# Altium PCB loratea.PcbDoc
Units mm, origin at the board's own origin, x right, y up, seen from the top; angles counter-clockwise.
Board outline 95.27 x 95.25 mm, 2 copper layers (Top Layer, Bottom Layer); 46 components, 36 nets, 161 pads, 104 vias.
Unrouted connection lines stored in the file: 1.
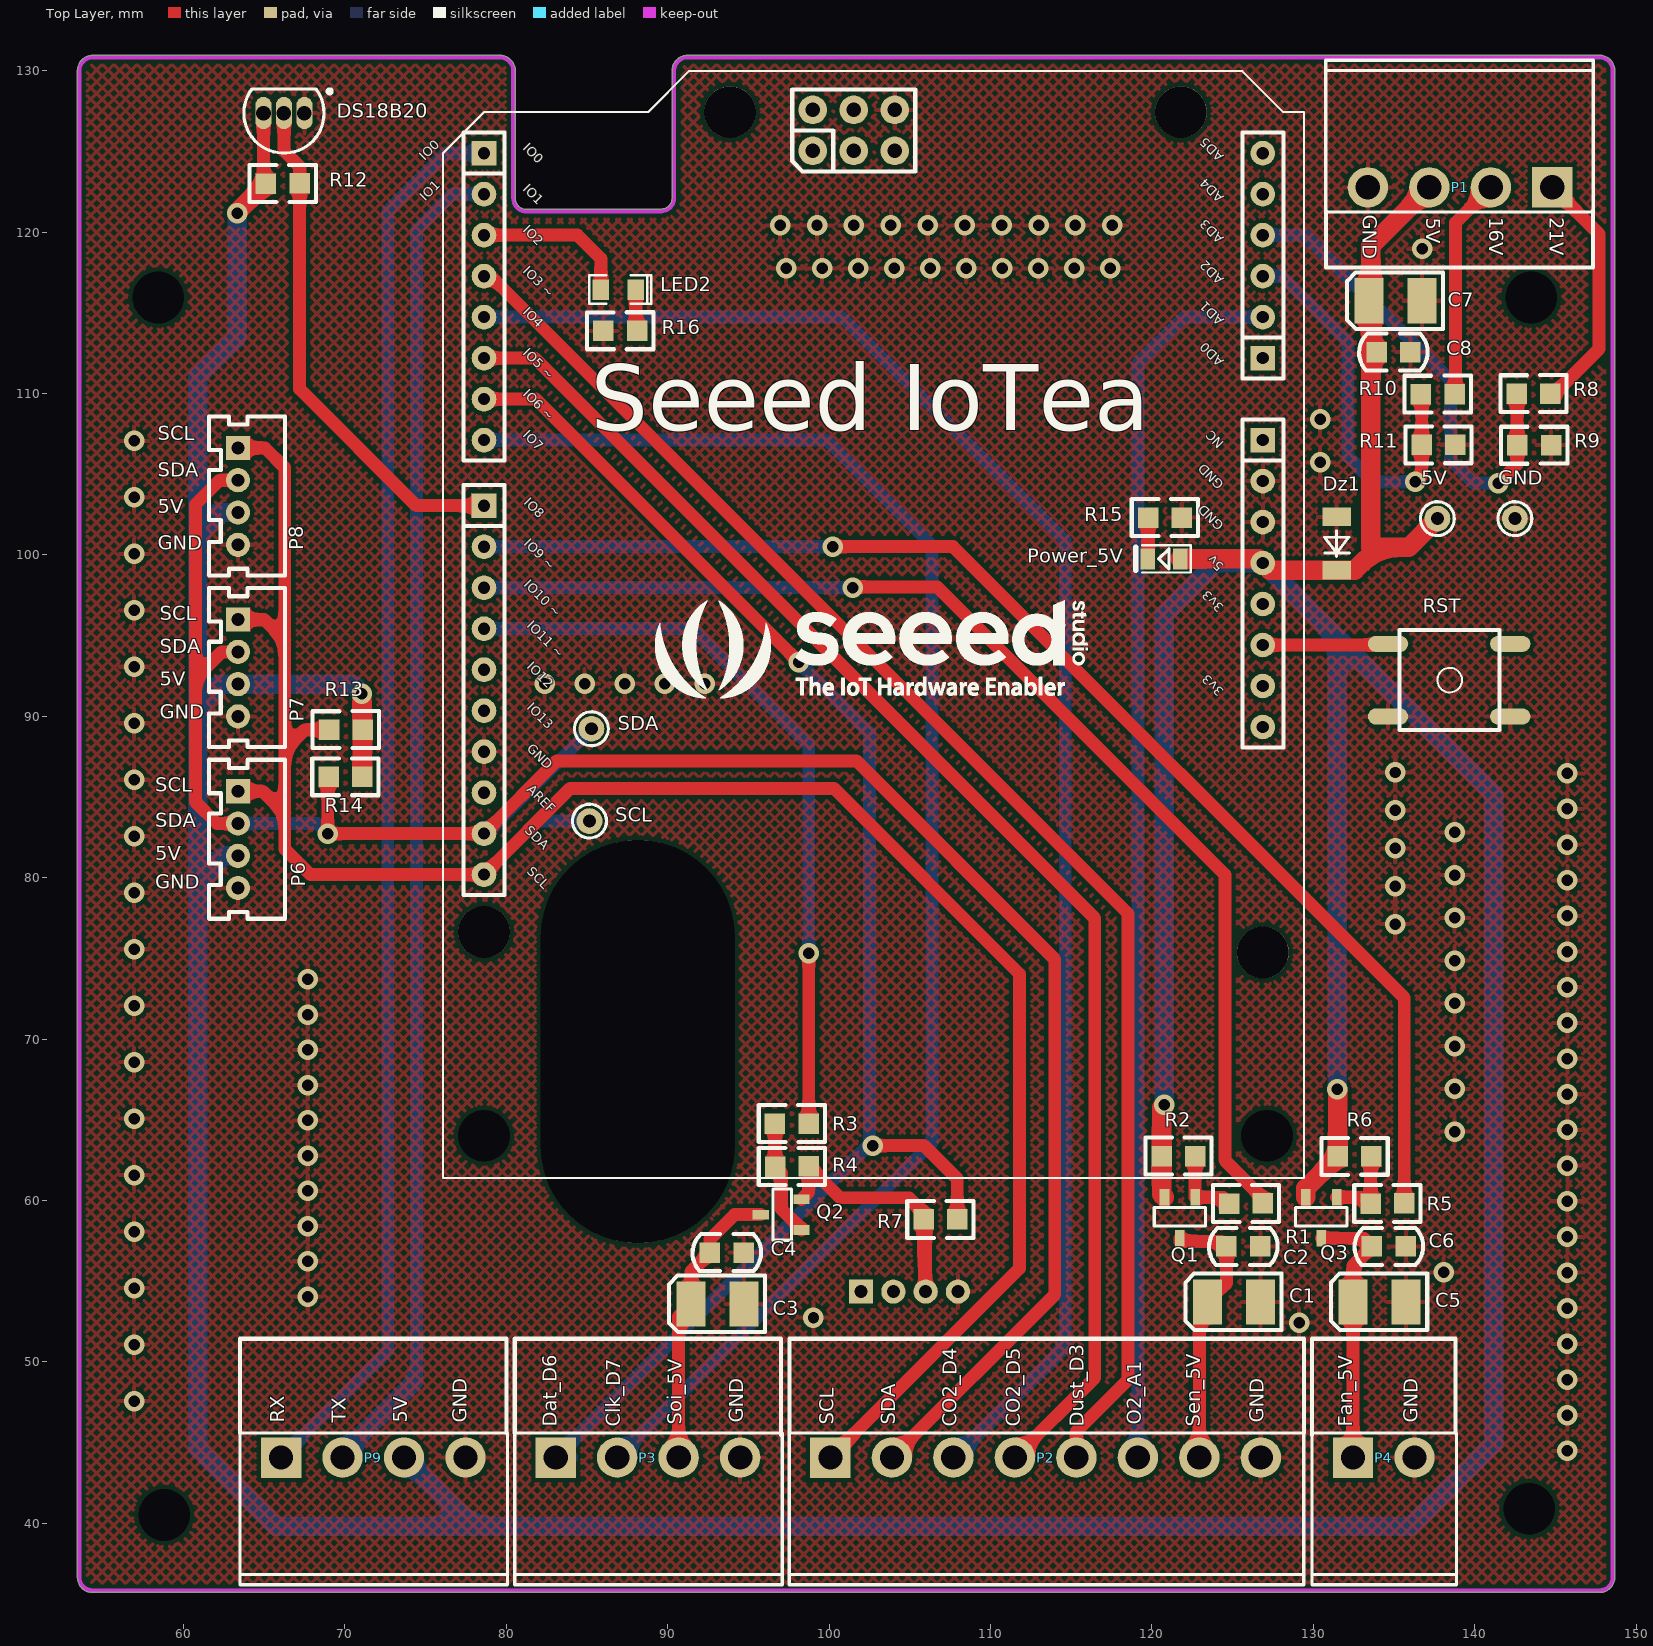
[diagram p0: Top Layer view]
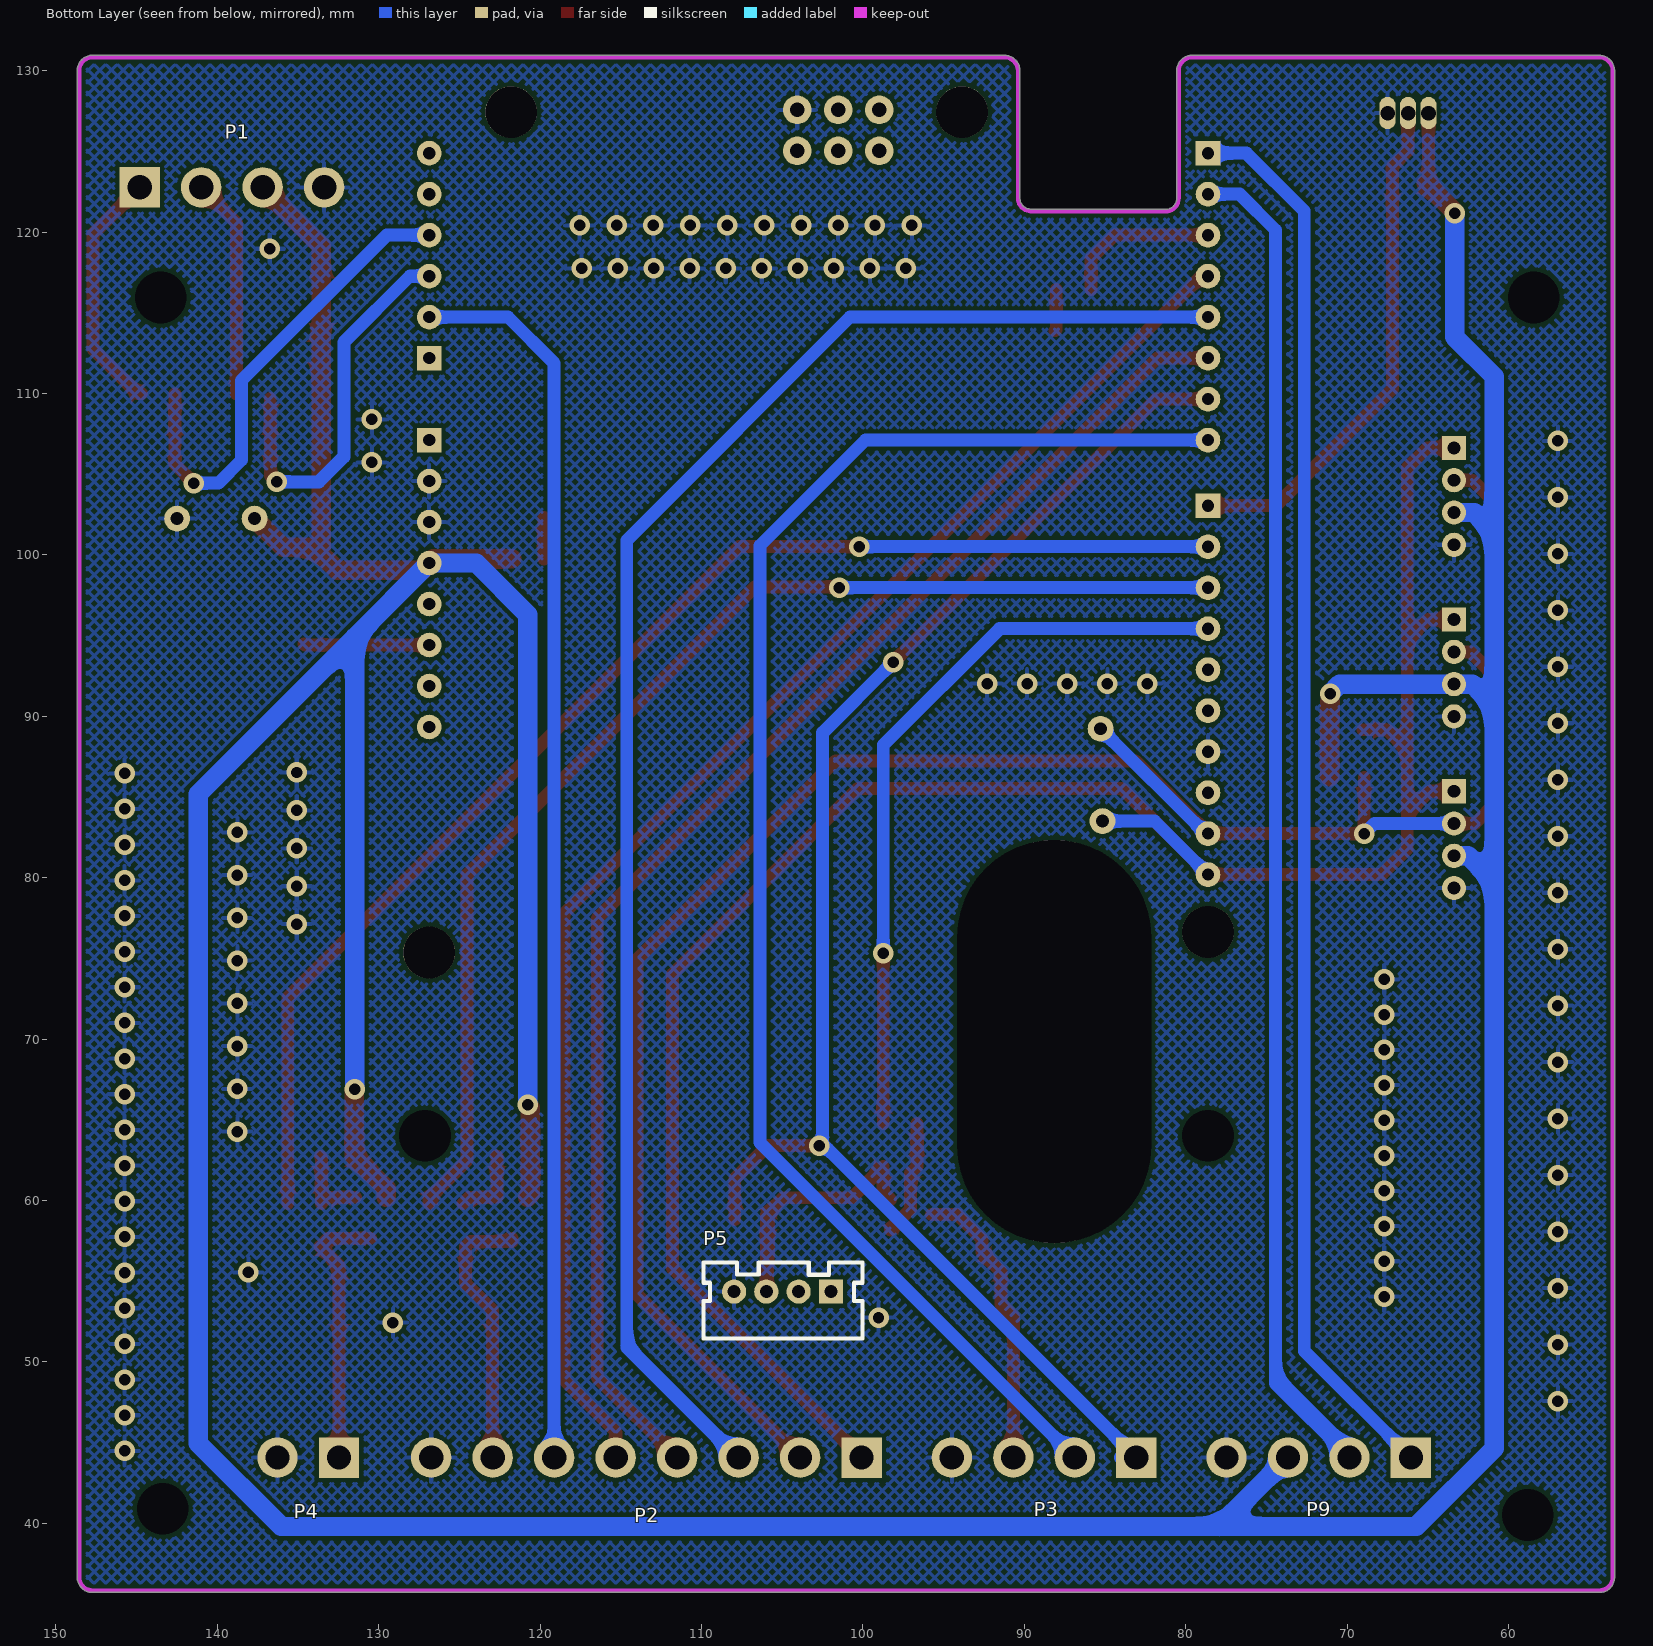
[diagram p1: Bottom Layer view, seen from below]

## Layer stack, top to bottom
Top Solder: solder mask 0.0102, Solder Resist, Dk 3.5
Top Layer: signal copper 0.0356
Dielectric 1: dielectric 0.32, FR-4, Dk 4.8
Bottom Layer: signal copper 0.0356
Bottom Solder: solder mask 0.0102, Solder Resist, Dk 3.5

## Board outline
53.422,36.609 ccw(c54.361,36.65) 54.361,35.71 147.737,35.71 ccw(c147.737,36.65) 148.677,36.65 ccw(c148.55,36.65) 148.675,36.672 ccw(c148.551,36.699) 148.678,36.699 148.678,130.022 ccw(c147.738,130.022) 147.738,130.962 ccw(c147.738,130.835) 147.686,130.951 91.21,130.951 ccw(c91.21,130.011) 90.27,130.011 90.27,122.114 cw(c89.584,122.114) 89.584,121.428 ccw(c89.584,121.301) 89.523,121.412 81.259,121.412 ccw(c81.236,121.287) 81.236,121.414 cw(c81.236,122.1) 80.55,122.1 80.55,130.011 ccw(c79.61,130.011) 79.775,130.937 ccw(c79.716,130.824) 79.716,130.951 54.36,130.951 ccw(c54.36,130.011) 53.421,130.051 ccw(c53.538,130.002) 53.411,130.002 53.411,36.66 ccw(c53.538,36.66)

## Design rules (kind name [scope] priority, off if disabled: settings)
Clearance [All] p1: gap=0.254
PolygonConnect [All] p1: connectstyle=Relief reliefconductorwidth=0.254 reliefentries=4 polygonreliefangle="90 Angle" airgapwidth=0.254
RoutingVias [All] p1: holewidth=0.711 width=1.27 viastyle="Through Hole" minholewidth=0.711 minwidth=1.27 maxholewidth=0.711 maxwidth=1.27
SolderMaskExpansion [All] p1: expansion=0.102
Width [All] p1: maxlimit=20 minlimit=0.254 preferedwidth=0.8 minimp=50.000000 maximp=50.000000 favimp=50.000000
30 further rules are at their usual default settings.

## Components (designator, comment, footprint, x,y, rotation, side; value= is the part's Value field where it differs from the comment)
5V "TestPoint" TP 137.69,102.25 r0 top (schematic designator TP4)
C1 "220uF" C3528 125.095,53.721 r0 top
C2 "0.1uF" C0805 126.873,57.15 r180 top
C3 "220uF" C3528 93.091,53.594 r0 top
C4 "0.1uF" C0805 94.869,56.769 r180 top
C5 "220uF" C3528 134.112,53.721 r0 top
C6 "0.1uF" C0805 135.89,57.15 r180 top
C7 "220uF" C3528 135.1,115.75 r0 top
C8 "0.1uF" C0805 136.17,112.57 r180 top
DS18B20 "DS18B20" TO92C 66.22,127.38 r90 top (schematic designator U1)
Dz1 "Diode-Zener" DIODE-0.2-SMD 131.445,102.362 r270 top
GND "TestPoint" TP 142.49,102.25 r0 top (schematic designator TP3)
LED2 "LED" LED0805G 85.86,116.44 r0 top
P1 "Header 4" 2EDG3.81-4P 144.81,122.78 r180 top
P2 "Header 8" 2EDG3.81-8P 103.886,44.069 r0 top
P3 "Header 4" 2EDG3.81-4P 83.058,44.069 r0 top
P4 "Header 2" 2EDG3.81-2P 132.461,44.069 r0 top
P5 "Soil_Grove_Power" PH2.0-4 101.981,54.356 r0 bottom
P6 "Header 4" PH2.0-4 63.37,85.36 r270 top
P7 "Header 4" PH2.0-4 63.37,95.995 r270 top
P8 "Header 4" PH2.0-4 63.37,106.63 r270 top
P9 "Header 4" 2EDG3.81-4P 66.04,44.069 r0 top
Power_5V "LED-R" LED0805 121.75,99.76 r180 top (schematic designator LED1)
Q1 "pMOS" AO3415 122.682,60.198 r180 top
Q2 "pMOS" AO3415 98.298,58.166 r90 top
Q3 "pMOS" AO3415 131.445,60.198 r180 top
R1 "100R" R0805 126.873,59.817 r180 top
R2 "100R" R0805 122.69,62.75 r180 top
R3 "100R" R0805 98.735,64.77 r180 top
R4 "100R" R0805 96.647,62.103 r0 top
R5 "100R" R0805 135.636,59.817 r180 top
R6 "100R" R0805 133.604,62.738 r180 top
R7 "100R" R0805 107.94,58.83 r180 top
R8 "53.6K" R0805 142.6,109.99 r0 top
R9 "10K" R0805 144.73,106.801 r180 top
R10 "38.3K" R0805 136.67,109.96 r0 top
R11 "10K" R0805 138.8,106.826 r180 top
R12 "4.7K" R0805 67.19,123.02 r180 top
R13 "4.7K" R0805 69.01,89.17 r0 top
R14 "4.7K" R0805 68.98,86.25 r0 top
R15 "1k" R0805 121.85,102.32 r180 top
R16 "1K" R0805 86.01,113.888 r0 top
RST "SW-3s" KEY6X6SMD 138.47,92.24 r180 top (schematic designator SW1)
SCL "TestPoint" TP 85.15,83.51 r0 top (schematic designator TP1)
SDA "TestPoint" TP 85.27,89.23 r0 top (schematic designator TP2)
"Seeed IoTea" "Seeeduino LoRaWAN" "Seeeduino LoRaWAN" 102.743,101.473 r90 top (schematic designator "Seeeduino LoRaWAN")

## Footprints (in the part's own frame and the unit in brackets; to place one, negate y for a bottom-side part, rotate by r counter-clockwise, add the part's x,y. Pads: shape width x height; smd on the part's side, far side on the other; paste and mask are expansions set on the pad)
2EDG3.81-2P [mm]
  rect 2.5x2.5 hole 1.5: 1(0,0)
  round 2.5 hole 1.5: 2(3.81,0)
  silkscreen extent -2.54,-7.87 6.41,1.52, body extent -2.63,-7.77 6.38,1.53, height 7.25
2EDG3.81-4P [mm]
  rect 2.5x2.5 hole 1.5: 1(0,0)
  round 2.5 hole 1.5: 2(3.81,0) 3(7.62,0) 4(11.43,0)
  silkscreen extent -2.54,-7.87 14.03,1.52, body extent -2.6,-8 14.03,1.3, height 7.25
2EDG3.81-8P [mm]
  rect 2.5x2.5 hole 1.5: 1(-3.81,0)
  round 2.5 hole 1.5: 2(0,0) 3(3.81,0) 4(7.62,0) 5(11.43,0) 6(15.24,0) 7(19.05,0) 8(22.86,0)
  silkscreen extent -6.35,-7.87 25.53,1.52, body extent -6.41,-8 25.59,1.3, height 7.25
AO3415 [mm] "AO3415 pMOSFET (Vds=20V, Id=-4A)"
  rect 0.6x1 smd: D(0.955,2.54) G(0,0) S(1.905,0)
  silkscreen extent -0.64,0.63 2.54,1.78
C0805 [mil]
  rect 50x50 smd: 1(6,0) 2(88.7,-0.1)
  silkscreen extent -36,-45 131,45, body extent 8,-24 87,25, height 30
C3528 [mil] "B型"
  rect 70.87x110 smd: 1(-64.5,0) 2(64.5,0)
  silkscreen extent -119,-69 116,69, body extent -69,-55 69,55, height 75
DIODE-0.2-SMD [mil] "1N4148柱状贴片封装"
  rect 45x70 smd: 1(0,0) 2(130,0)
  silkscreen extent 34,-30 97,31
KEY6X6SMD [mm]
  oval 2.5x1 smd: 1(-3.734,2.25) 1(3.835,2.25) 2(-3.734,-2.25) 2(3.835,-2.25)
  silkscreen extent -3.08,-3.1 3.12,3.09, body extent -4.48,-3.1 4.52,3.1, height 4.5
LED0805 [mm]
  rect 0.9x1.3 smd: 1(0,0) 2(2,0)
  silkscreen extent -0.65,-0.85 2.74,0.85
LED0805G [mil]
  rect 40x50 smd: 1(0,0) 2(85,0)
  silkscreen extent -29,-35 123,35, body extent 3,-24 83,25, height 43
PH2.0-4 [mm]
  rect 1.5x1.5 hole 0.8: 1(0,0)
  round 1.5 hole 0.8: 2(2,0) 3(4,0) 4(6,0)
  silkscreen extent -1.95,-1.79 7.9,2.91
R0805 [mm] "1/8W"
  rect 1.27x1.27 smd: 1(0,0) 2(2.09,0.005)
  silkscreen extent -1.01,-1.14 3.1,1.15, body extent 0.04,-0.62 2.04,0.64, height 0.55
"Seeeduino LoRaWAN" [mil]
  round 125.98 hole 125.98: 0(-1027.76,-950) 0(-977.76,950) 0(1022.24,-750) 0(1022.24,350)
  rect 60x60 hole 30: 0(922.24,950) 8(62.24,950) A0(422.24,-950) NC(222.24,-950)
  round 60 hole 30: 1(822.24,950) 2(722.24,950) 3(622.24,950) 3V3(-377.76,-950) 3V3(-177.76,-950) 4(522.24,950) 5(422.24,950) 5V(-77.76,-950) 6(322.24,950) 7(222.24,950) 9(-37.76,950) 10(-137.76,950) 11(-237.76,950) 12(-337.76,950) 13(-437.76,950) A1(522.24,-950) A2(622.24,-950) A3(722.24,-950) A4(822.24,-950) A5(922.24,-950) AREF(-637.76,950) GND(-537.76,950) GND(22.24,-950) GND(122.24,-950) RESERVE(-477.76,-950) RST(-277.76,-950) SCL(-837.76,950) SDA(-737.76,950)
  round 70 hole 35.43: GND(1027.76,-51.97) MISO(927.76,148.03) MOSI(1027.76,48.03) RST(927.76,-51.97) SCK(927.76,48.03) VCC(1027.76,148.03)
  silkscreen extent -1578,-1050 1122,1050, body extent -888,-1000 1078,1000, height 485
TO92C [mm] "TO, Flat Index; 3 In-Line, Axial Leads; Body Dia. 4.5mm; Leads 0.51 x 0.48 mm (max)"
  oval 2x1 hole 0.9: 1(0,-1.27) 2(0,0) 3(0,1.27)
  silkscreen extent -2.48,-2.96 1.5,2.48, body extent -2.32,-2.45 1.68,2.35, height 8.09
TP [mm] "测试点"
  round 1.6 hole 0.8: 1(0,0)
  silkscreen extent -1.05,-1.05 1.05,1.05

## Part data
5V GND SCL SDA: "一个测试点"
C1 C2 C3 C4 C5 C6 C7 C8: library part Cap, "无极电容"
DS18B20: "单总线温度传感器"
Dz1: "稳压二极管"
LED2: "绿色发光二极管"
P1 P3 P6 P7 P8 P9: "Header, 4-Pin"
P2: "Header, 8-Pin"
P4: "Header, 2-Pin"
P5: library part "Header 4", "Header, 4-Pin"
Power_5V: "红色发光二极管"
Q1 Q2 Q3: library part pMOS-FET, "增强型P沟道金属氧化物半导体场效应晶体管"
R1 R2 R3 R4 R5 R6 R7 R8 R9 R10 R11 R12 R13 R14 R15 R16: library part RES, "电阻  RES"
RST: "开关排，3位"

## Free pads (board coordinates)
  round 1.524 hole 3.2: 0(58.42,115.951) 0(58.801,40.513) 0(78.613,64.008) 0(127.127,64.008) 0(143.383,40.894) 0(143.51,115.951)
  rrect100% 10x25 hole 12 slot 25 at 90 deg: 0(88.138,69.85)

## Via types
v1: diameter 1.27, hole 0.711, Top Layer to Bottom Layer, 104 vias

## Nets (pads, with @x,y where several pads share a name; then routed paths per layer and width w, separated by ;. In a path a pad name is that pad's centre, name@x,y a point inside that pad or via, vN(x,y) a via of type N, cw(c..) or ccw(c..) an arc to the next point about the centre after c; other vN are vias at no path point)
5V: 5V.1 "Seeed IoTea.5V" C7.1 C8.2 DS18B20.3 Dz1.2 P1.3 P6.3 P7.3 P8.3 P9.3 Power_5V.1 Q1.S Q3.S R2.2 R6.2 R12.2 R13.2 R14.2 | length 378.7
  Top Layer w0.8: DS18B20.3 64.95,123.165 R12.2
  Top Layer w1.2: v1@63.287,121.203 R12.2 ; v1(71.05,91.4) 71.05,89.225 R13.2 71.07,89.145 R14.2 ; v1(120.77,65.93) 120.6,65.76 R2.2 120.6,60.375 Q1.S ; Power_5V.1 126.611,99.76 126.873,99.498 127.311,99.06 Dz1.2 132.57,99.06 133.99,100.48 ; Q3.S 129.54,60.759 R6.2 v1@131.514,66.856 ; P1.3 133.57,119.16 133.57,100.48 135.92,100.48 5V.1
  Bottom Layer w1.2: v1(63.33,121.16) 63.33,113.51 60.88,111.06 60.88,101.39 ; P6.3 62.5,81.36 60.88,79.74 ; P8.3 62.12,102.63 60.88,101.39 ; v1(71.05,91.4) 70.455,91.995 P7.3 62.225,91.995 60.88,90.65 ; P9.3 77.929,39.8 ; v1(120.77,65.93) 120.77,96.31 123.958,99.498 126.873,99.498 131.48,94.891 ; v1(131.48,66.89) 131.48,94.891 ; 60.88,79.74 60.88,44.64 65.72,39.8 77.929,39.8 ; 60.88,79.74 60.88,90.65 ; 60.88,90.65 60.88,101.39 ; 77.929,39.8 136.029,39.8 141.18,44.951 141.18,85.191 131.48,94.891
16V: P1.2 R10.2 | length 13.7
  Top Layer w0.8: R10.2@138.81,109.965 138.81,120.59 P1.2
21V: P1.1 R8.2 | length 15.4
  Top Layer w0.8: R8.2 144.929,109.995 147.71,112.776 147.71,119.88 P1.1
A0: "Seeed IoTea.A0"
A2: "Seeed IoTea.A2" R10.1 R11.2 | length 24.2
  Top Layer w0.8: v1(136.33,104.53) 136.71,104.91 R11.2 ; R11.2@136.72,106.821 R10.1@136.72,109.7
  Bottom Layer w0.8: 126.873,117.278 128.062,117.278 132.16,113.18 132.16,106.08 133.71,104.53 v1(136.33,104.53)
A3: "Seeed IoTea.A3" R8.1 R9.2 | length 29.9
  Top Layer w0.8: v1(141.46,104.45) 142.64,105.63 R9.2 ; R9.2@142.63,106.796 R8.1@142.63,109.99
  Bottom Layer w0.8: 126.873,119.818 129.502,119.818 138.5,110.82 138.5,105.88 139.93,104.45 v1(141.46,104.45)
A4: "Seeed IoTea.A4"
A5: "Seeed IoTea.A5"
BME280_SCL: "Seeed IoTea.SCL" P2.1 P6.1 P7.1 P8.1 R13.1 SCL.1 | length 134.6
  Top Layer w0.8: P6.1 64.9,85.36 66.27,83.99 ; P7.1 64.975,95.995 66.27,94.7 66.27,93.2 ; P8.1 65.05,106.63 66.27,105.41 66.27,93.2 ; R13.1 67.51,89.17 66.27,87.93 ; P2.1 111.8,55.793 111.8,74.04 100.3,85.54 83.959,85.54 78.613,80.194 67.856,80.194 66.27,81.78 66.27,83.99 ; 66.27,83.99 66.27,87.93 ; 66.27,87.93 66.27,93.2
  Bottom Layer w0.8: 78.613,80.194 81.929,83.51 SCL.1
BME280_SDA: "Seeed IoTea.SDA" P2.2 P6.2 P7.2 P8.2 R14.1 SDA.1 | length 133.9
  Top Layer w0.8: 60.73,92.36 62.365,93.995 P7.2 ; P6.2 62.07,83.36 60.73,84.7 60.73,103.13 62.23,104.63 P8.2 ; R14.1@68.934,86.204 v1(68.934,82.734) 78.613,82.734 83.119,87.24 101.69,87.24 113.98,74.95 113.98,54.163 P2.2
  Bottom Layer w0.8: P6.2 68.308,83.36 v1(68.934,82.734) ; 78.613,82.734 78.774,82.734 SDA.1
CO2_D4: "Seeed IoTea.4" P2.3 | length 111.3
  Bottom Layer w0.8: 78.613,114.738 100.792,114.738 114.63,100.9 114.63,51.003 ; 114.63,51.003 114.63,50.89 107.809,44.069 P2.3 114.63,51.003
CO2_D5: "Seeed IoTea.5" P2.4 | length 87.7
  Top Layer w0.8: 78.613,112.198 81.752,112.198 116.46,77.49 116.46,49.023 P2.4
D2: "Seeed IoTea.2" LED2.1 | length 9.8
  Top Layer w0.8: 78.613,119.818 84.402,119.818 85.86,118.36 LED2.1
D8: "Seeed IoTea.8" DS18B20.2 R12.1 | length 31.9
  Top Layer w0.8: DS18B20.2 66.22,125.03 67.19,124.06 R12.1 67.19,110.28 74.416,103.054 78.613,103.054
D9: "Seeed IoTea.9" R5.1 | length 81.3
  Top Layer w0.8: v1(100.226,100.514) 107.676,100.514 135.636,72.554 R5.1
  Bottom Layer w0.8: 78.613,100.514 99.814,100.514 v1(100.226,100.514)
D10: "Seeed IoTea.10" R1.1 | length 74.7
  Top Layer w0.8: v1(101.464,97.974) 101.58,98.02 106.7,98.02 124.52,80.2 124.52,62.5 126.873,60.147 R1.1
  Bottom Layer w0.8: 78.613,97.974 v1(101.464,97.974)
D11: "Seeed IoTea.11" R3.1 | length 46.6
  Top Layer w0.8: R3.1 v1(98.735,75.312)
  Bottom Layer w0.8: 78.613,95.434 91.526,95.434 98.735,88.225 v1(98.735,75.312)
D12: "Seeed IoTea.12"
D13: "Seeed IoTea.13"
DUST_D3: "Seeed IoTea.3" P2.5 | length 91.3
  Top Layer w0.8: 78.613,117.278 79.022,117.278 118.52,77.78 118.52,48.894 115.316,45.69 P2.5
GND: "Seeed IoTea.GND" C1.2 C2.1 C3.2 C4.1 C5.2 C6.1 C7.2 C8.1 DS18B20.1 Dz1.1 GND.1 P1.4 P2.8 P3.4 P4.2 P5.4 P6.4 P7.4 P8.4 P9.4 R9.1 R11.1 R15.1 R16.1 RST.1
  other v1: 145.75,44.48 145.75,46.69 56.93,47.57 145.75,48.9 56.93,51.07 145.75,51.11 129.12,52.43 99.03,52.74 145.75,53.32 67.69,54.05 56.93,54.57 145.75,55.53 138.08,55.55 67.69,56.233 145.75,57.74 56.93,58.07 67.69,58.417 145.75,59.95 67.69,60.6 56.93,61.57 145.75,62.16 67.69,62.783 138.76,64.27 145.75,64.37 67.69,64.967 56.93,65.07 145.75,66.58 138.76,66.919 67.69,67.15 56.93,68.57 145.75,68.79 67.69,69.333 138.76,69.567 145.75,71 67.69,71.517 56.93,72.07 138.76,72.216 145.75,73.21 67.69,73.7 138.76,74.865 145.75,75.42 56.93,75.57 135.08,77.12 138.76,77.514 145.75,77.63 56.93,79.07 135.08,79.47 145.75,79.84 138.76,80.162 135.08,81.82 145.75,82.05 56.93,82.57 138.76,82.811 135.08,84.17 145.75,84.26 56.93,86.07 145.75,86.47 135.08,86.52 56.93,89.57 82.37,92.03 84.852,92.03 87.335,92.03 89.817,92.03 92.3,92.03 56.93,93.07 56.93,96.57 56.93,100.07 56.93,103.57 130.42,105.73 56.93,107.07 130.42,108.402 97.33,117.76 99.563,117.76 101.797,117.76 104.03,117.76 106.263,117.76 108.497,117.76 110.73,117.76 112.963,117.76 115.197,117.76 117.43,117.76 136.75,118.97 96.96,120.42 99.248,120.42 101.536,120.42 103.823,120.42 106.111,120.42 108.399,120.42 110.687,120.42 112.974,120.42 115.262,120.42 117.55,120.42
GROVE_3V3: P5.3 Q2.S R4.2 R7.2 | length 19.9
  Top Layer w0.8: Q2.S 98.737,60.51 R4.2 100.677,60.169 104.951,60.169 105.981,59.139 P5.3 105.85,56.778 R7.2
NetC1_1: C1.1 C2.2 P2.7 Q1.D | length 17
  Top Layer w0.8: Q1.D 121.727,57.469 124.304,57.469 C2.2 124.62,54.884 C1.1 122.936,53.2 P2.7
NetC3_1: C3.1 C4.2 P3.3 Q2.D | length 18.1
  Top Layer w0.8: P3.3 90.678,52.819 C3.1 91.453,55.608 C4.2 92.616,57.606 94.131,59.121 Q2.D
NetC5_1: C5.1 C6.2 P4.1 Q3.D | length 19.2
  Top Layer w0.8: Q3.D 133.132,57.658 C6.2 132.474,55.989 ; P4.1 132.461,55.977 132.474,55.989 ; C5.1 132.474,55.989
NetLED1_2: Power_5V.2 R15.2 | length 2.6
  Top Layer w0.8: Power_5V.2 119.76,99.77 R15.2
NetLED2_2: LED2.2 R16.2 | length 2.6
  Top Layer w0.8: LED2.2 88.019,113.974 R16.2
NetQ1_G: Q1.G R1.2 R2.1 | length 4.8
  Top Layer w0.8: R2.1 122.682,62.742 Q1.G 124.396,60.198 R1.2
NetQ2_G: Q2.G R3.2 R4.1 | length 7.3
  Top Layer w0.8: R3.2 96.644,62.106 R4.1 97.044,61.706 97.044,59.459 98.298,58.205 Q2.G
NetQ3_G: Q3.G R5.2 R6.1 | length 5.2
  Top Layer w0.8: Q3.G 133.16,60.198 R5.2 133.546,62.68 R6.1
"NetSeeeduino LoRaWAN_RST": "Seeed IoTea.RST"@126.873,94.418 RST.2 | length 7.8
  Top Layer w0.8: 126.873,94.418 134.563,94.418 RST.2@134.635,94.49
O2_A1: "Seeed IoTea.A1" P2.6 | length 76.7
  Bottom Layer w0.8: P2.6 119.126,106.991 119.126,111.876 121.988,114.738 126.873,114.738
RX: "Seeed IoTea.0"@78.613,124.898 P9.1 | length 87.4
  Bottom Layer w0.8: P9.1 72.65,50.679 72.65,118.935 72.65,121.31 76.238,124.898 78.613,124.898
SOIL_CLK_D7: "Seeed IoTea.7" P3.2 | length 95.1
  Bottom Layer w0.8: 78.613,107.118 99.842,107.118 106.38,100.58 106.38,63.581 P3.2
SOIL_DATA_D6: "Seeed IoTea.6" P3.1 R7.1 | length 101.1
  Top Layer w0.8: 78.613,109.658 81.822,109.658 v1@98.195,93.285 ; v1(102.7,63.4) 105.89,63.4 107.94,61.35 R7.1
  Bottom Layer w0.8: P3.1@84.049,44.069 P3.1 102.49,63.501 102.49,88.99 ; 102.49,88.99 98.195,93.285 102.49,88.99
  other v1: 98.12,93.36
TX: "Seeed IoTea.1" P9.2 | length 90
  Bottom Layer w0.8: 78.613,122.358 76.648,122.358 74.43,120.14 74.43,118.175 74.43,49.12 ; 74.43,49.12 74.43,48.649 P9.2 69.85,44.54 74.43,49.12
pads on no net: "Seeed IoTea.0"@78.613,76.638 "Seeed IoTea.0"@93.853,127.438 "Seeed IoTea.0"@121.793,127.438 "Seeed IoTea.0"@126.873,75.368 "Seeed IoTea.3V3" "Seeed IoTea.AREF" "Seeed IoTea.MISO" "Seeed IoTea.MOSI" "Seeed IoTea.NC" "Seeed IoTea.RESERVE" "Seeed IoTea.RST"@104.063,125.038 "Seeed IoTea.SCK" "Seeed IoTea.VCC" P5.1 P5.2

## Polygon pours and split planes (outlines as drawn)
GND on Top Layer "Top Layer-No Net" (hatched 45Degree grid 0.508 track 0.203, remove dead copper, pour order 6): 147.698,130.824 148.5,130.022 148.551,130.022 148.551,36.699 147.737,35.885 147.737,35.837 54.41,35.837 53.55,36.697 53.55,37.01 53.55,130.014 54.36,130.824 79.61,130.824 80.423,130.011 80.423,122.098 81.236,121.285 89.482,121.285 90.397,122.2 90.397,129.717 91.54,130.86 147.713,130.86 147.738,130.835
GND on Bottom Layer "Top Layer-No Net" (hatched 45Degree grid 0.508 track 0.203, remove dead copper, pour order 8): 147.737,35.837 148.551,36.651 148.551,36.699 148.551,130.022 147.749,130.824 147.698,130.824 91.301,130.824 90.397,129.92 90.397,122.114 89.584,121.301 81.222,121.301 80.423,122.1 80.423,130.091 79.69,130.824 54.36,130.824 53.538,130.002 53.538,36.66 54.361,35.837 147.737,35.837

## Keep-outs
Keep-Out Layer:
  lines w0.254: 53.538,130.002 53.538,36.66 53.548,36.65 ccw(c54.361,36.65) 54.361,35.837 147.737,35.837 ccw(c147.737,36.65) 148.55,36.65 ; 53.547,130.011 cw(c54.36,130.011) 54.36,130.824 79.716,130.824 ; 79.61,130.824 cw(c79.61,130.011) 80.423,130.011 80.423,122.1 ccw(c81.236,122.1) 81.236,121.287 ; 81.236,121.285 89.6,121.285 ; 89.584,121.301 ccw(c89.584,122.114) 90.397,122.114 90.397,130.011 cw(c91.21,130.011) 91.21,130.824 147.698,130.824 ; 147.738,130.835 cw(c147.738,130.022) 148.551,130.022 148.551,36.699

## Silkscreen, mask and mechanical layers (free items; w line width, h text height)
Top Overlay:
  drawing of 15233 lines, arcs and shapes, not listed
  text "IO0" at 75.11,124.23 h1 r45
  text "IO1" at 75.14,121.74 h1 r45
  text "GND" at 132.761,121.092 h1.52 r270
  text "16V" at 140.58,120.93 h1.52 r270
  text "21V" at 144.35,120.91 h1.52 r270
  text "5V" at 136.7,120.89 h1.52 r270
  text "SCL" at 58.41,106.81 h1.52
  text "SDA" at 58.41,104.54 h1.52
  text "5V" at 58.41,102.27 h1.52
  text "GND" at 58.41,100 h1.52
  text "SCL" at 58.51,95.64 h1.52
  text "SDA" at 58.51,93.61 h1.52
  text "5V" at 58.51,91.58 h1.52
  text "GND" at 58.51,89.55 h1.52
  text "SCL" at 58.24,85.01 h1.52
  text "SDA" at 58.24,82.81 h1.52
  text "5V" at 58.24,80.78 h1.52
  text "GND" at 58.24,79 h1.52
  text "RX" at 66.548,46.228 h1.52 r90
  text "TX" at 70.358,46.228 h1.52 r90
  text "5V" at 74.168,46.228 h1.52 r90
  text "GND" at 77.851,46.228 h1.52 r90
  text "GND" at 94.996,46.228 h1.52 r90
  text "GND" at 127.254,46.228 h1.52 r90
  text "GND" at 136.779,46.228 h1.52 r90
  text "Soi_5V" at 91.186,46.101 h1.52 r90
  text "SCL" at 100.584,46.101 h1.52 r90
  text "SDA" at 104.394,46.101 h1.52 r90
  text "O2_A1" at 119.634,46.101 h1.52 r90
  text "Dat_D6" at 83.439,45.974 h1.52 r90
  text "Clk_D7" at 87.376,45.974 h1.52 r90
  text "CO2_D4" at 108.204,45.974 h1.52 r90
  text "CO2_D5" at 112.141,45.974 h1.52 r90
  text "Dust_D3" at 116.078,45.974 h1.52 r90
  text "Sen_5V" at 123.317,45.974 h1.52 r90
  text "Fan_5V" at 132.715,45.974 h1.52 r90

## Text inside footprints (layer, text, board x,y; h text height)
"Seeed IoTea": Top Overlay "AREF" at 81.079,85.274 h1 r315; Top Overlay "GND" at 81.079,87.814 h1 r315; Top Overlay "IO13" at 81.079,90.354 h1 r315; Top Overlay "IO12" at 81.079,92.894 h1 r315; Top Overlay "IO11 ~" at 81.079,95.434 h1 r315; Top Overlay "IO10 ~" at 80.899,97.974 h1 r315; Top Overlay "IO9 ~" at 80.899,100.514 h1 r315; Top Overlay "IO8" at 80.899,103.054 h1 r315; Top Overlay "IO7" at 80.825,107.245 h1 r315; Top Overlay "IO6 ~" at 80.825,109.785 h1 r315; Top Overlay "IO5 ~" at 80.825,112.325 h1 r315; Top Overlay "IO4" at 80.825,114.865 h1 r315; Top Overlay "IO3 ~" at 80.825,117.405 h1 r315; Top Overlay "IO2" at 80.825,119.945 h1 r315; Top Overlay "IO1" at 80.825,122.485 h1 r315; Top Overlay "IO0" at 80.825,125.025 h1 r315; Top Overlay "AD5" at 124.661,124.898 h1 r135; Top Overlay "AD4" at 124.661,122.358 h1 r135; Top Overlay "AD3" at 124.661,119.818 h1 r135; Top Overlay "AD2" at 124.661,117.278 h1 r135; Top Overlay "AD1" at 124.661,114.738 h1 r135; Top Overlay "AD0" at 124.661,112.198 h1 r135; Top Overlay "NC" at 124.661,107.118 h1 r135; Top Overlay "GND" at 124.661,104.578 h1 r135; Top Overlay "GND" at 124.661,102.038 h1 r135; Top Overlay "5v" at 124.661,99.498 h1 r135; Top Overlay "3v3" at 124.661,96.958 h1 r135; Top Overlay "3v3" at 124.661,91.751 h1 r135; Top Overlay "SDA" at 80.952,82.734 h1 r315; Top Overlay "SCL" at 81.079,80.194 h1 r315